# Altium PCB ATRACK_HOST_V1.PcbDoc (part 3 of 3)
Units mm, origin at the board's own origin, x right, y up, seen from the top; angles counter-clockwise.
Board outline 156.4 x 87 mm, 2 copper layers (Top Layer, Bottom Layer); 274 components, 223 nets, 864 pads, 145 vias.
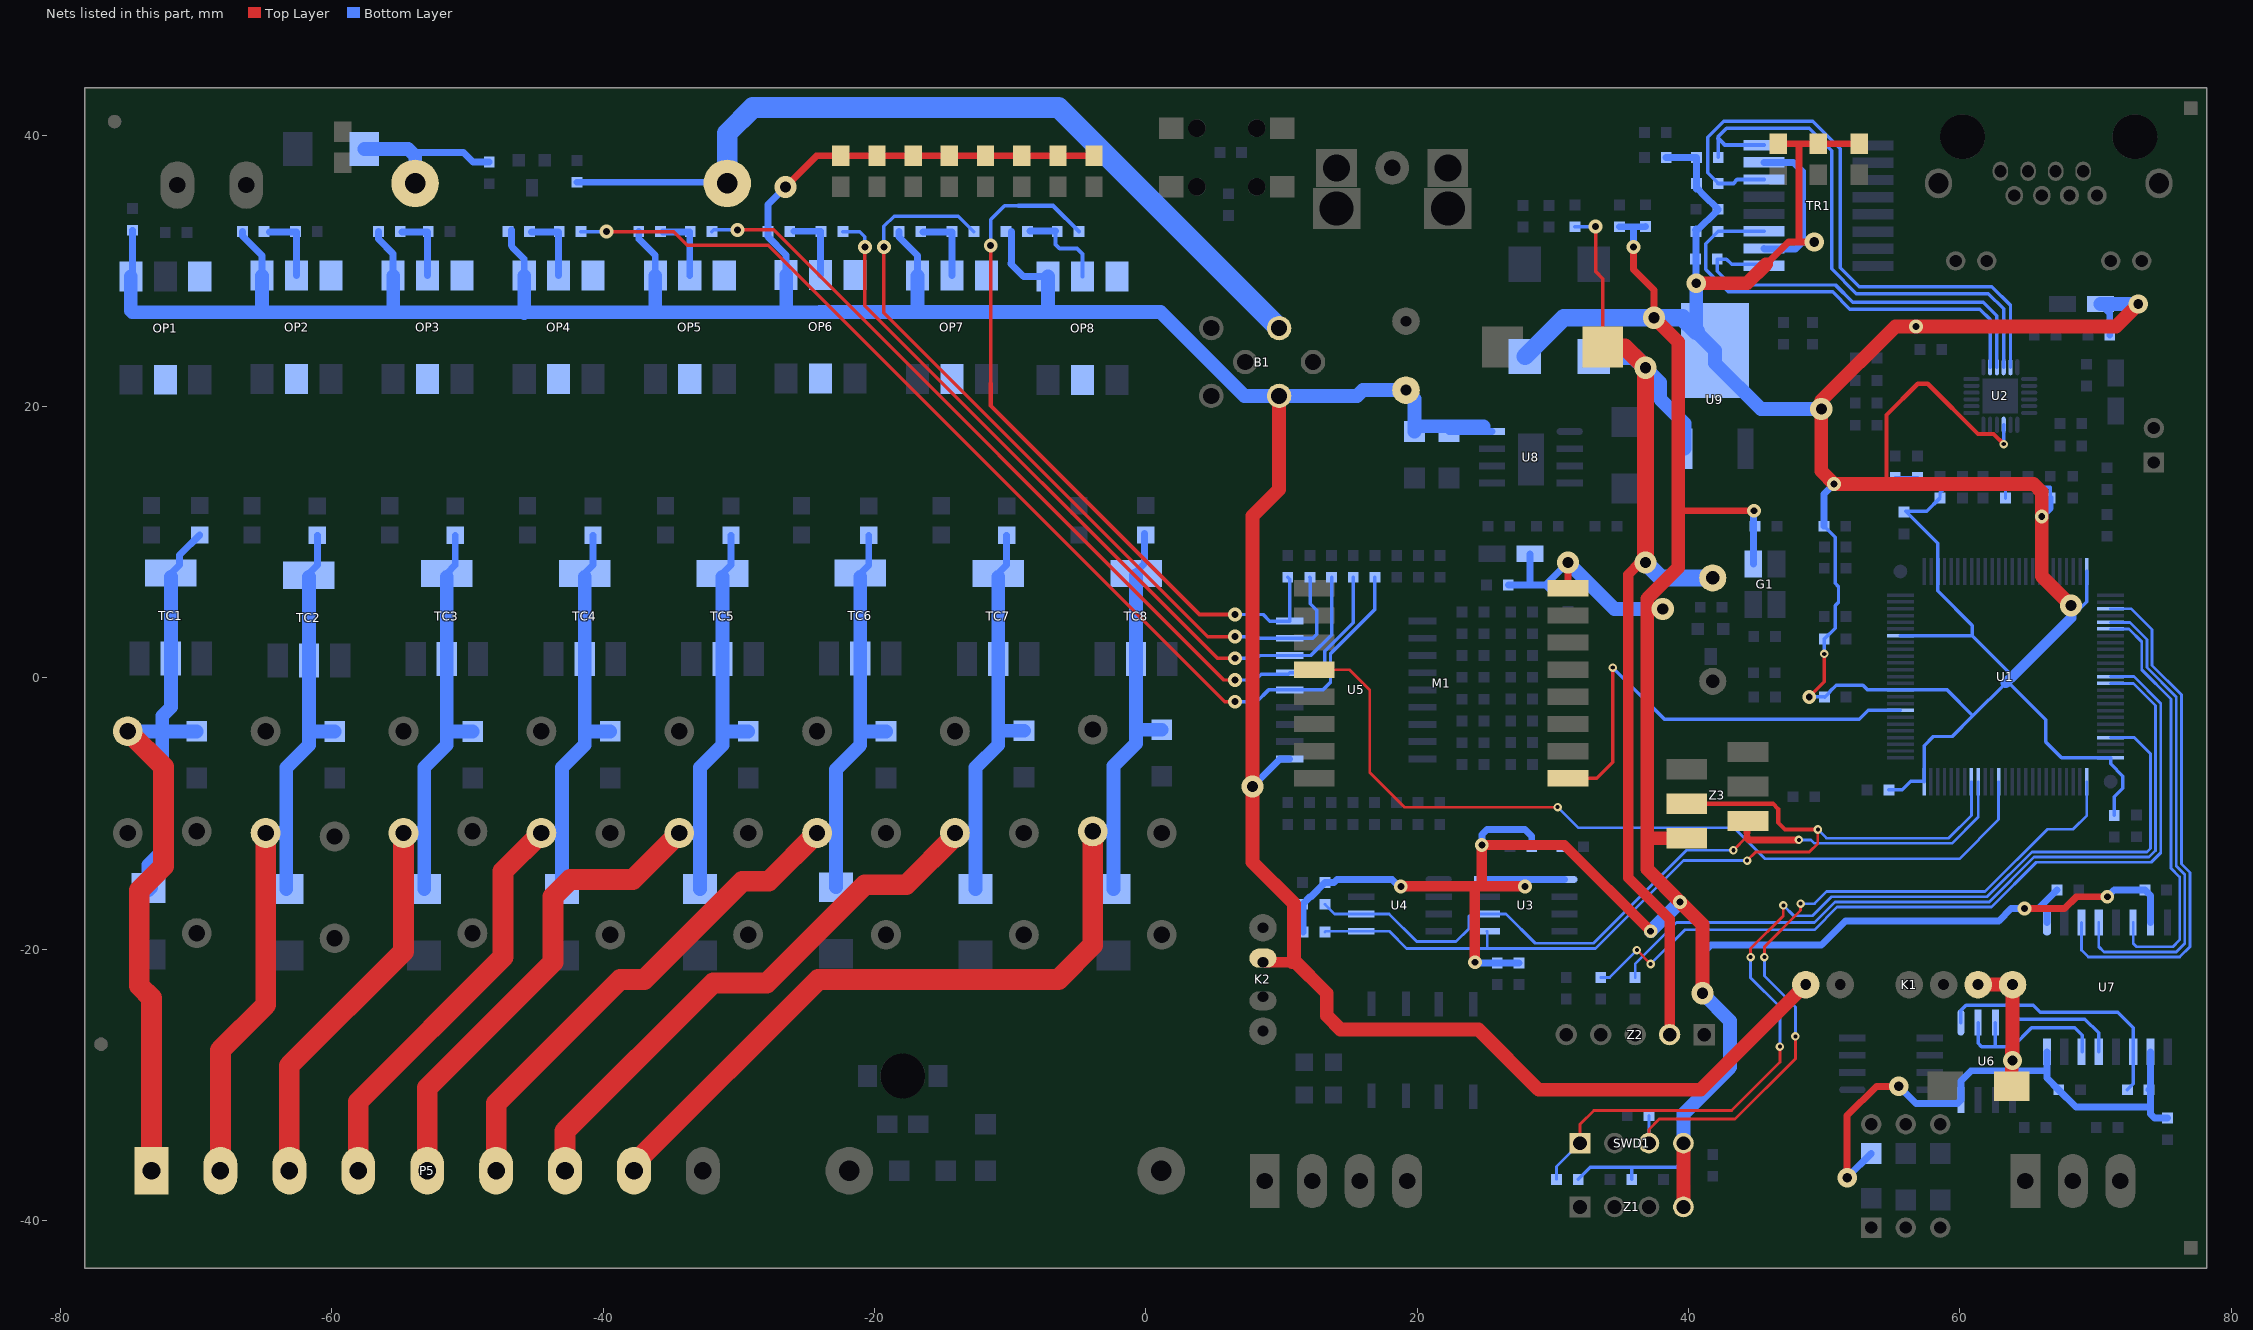
[diagram p3: the nets of this part, all layers, seen from the top]

## Via types
v1: diameter 1.016, hole 0.508, Top Layer to Bottom Layer, tented both sides, 58 vias
v2: diameter 0.635, hole 0.305, Top Layer to Bottom Layer, tented both sides, 39 vias
v3: diameter 0.635, hole 0.3, Top Layer to Bottom Layer, tented both sides, 18 vias
v4: diameter 1.626, hole 0.813, Top Layer to Bottom Layer, tented both sides, 15 vias
v5: diameter 1.422, hole 0.711, Top Layer to Bottom Layer, tented both sides, 7 vias
v6: diameter 1.016, hole 0.5, Top Layer to Bottom Layer, tented both sides, 5 vias
v7: diameter 2.134, hole 1.016, Top Layer to Bottom Layer, tented both sides, 1 vias
v8: diameter 1.524, hole 1, Top Layer to Bottom Layer, tented both sides, 1 vias
v9: diameter 1.422, hole 0.7, Top Layer to Bottom Layer, tented both sides, 1 vias

## Nets (pads, with @x,y where several pads share a name; then routed paths per layer and width w, separated by ;. In a path a pad name is that pad's centre, name@x,y a point inside that pad or via, vN(x,y) a via of type N, cw(c..) or ccw(c..) an arc to the next point about the centre after c; other vN are vias at no path point) (continued)
PZ1_4: R74.2 R93.1 U5.14 | length 79.3
  Top Layer w0.254: v1(-39.751,32.893) -34.798,32.893 -33.782,31.877 -27.813,31.877 5.817,-1.753 v1(6.579,-1.753)
  Bottom Layer w0.254: R93.1@-41.629,32.893 v1(-39.751,32.893) ; v1(6.579,-1.753) 8.179,-1.753 9.042,-0.889 U5.14@10.596,-0.889 13.03,-0.889 13.614,-0.305 13.614,1.781 16.891,5.058 R74.2@16.891,7.417
PZ1_5: R68.2 R96.1 U5.15 | length 66.8
  Top Layer w0.254: v1(-30.099,33.02) -27.432,33.02 5.74,-0.152 v1(6.579,-0.152)
  Bottom Layer w0.254: R96.1@-31.977,32.893 -31.85,33.02 v1(-30.099,33.02) ; v1(6.579,-0.152) 8.077,-0.152 8.509,0.279 10.495,0.279 U5.15@10.596,0.381 12.624,0.381 13.183,0.94 13.183,1.96 15.291,4.068 R68.2@15.291,7.417
PZ1_6: R63.2 R99.1 U5.16 | length 57
  Top Layer w0.254: v1(-20.701,31.75) -20.701,27.432 5.283,1.448 v1(6.579,1.448)
  Bottom Layer w0.254: R99.1@-22.325,32.893 -21.082,32.893 -20.701,32.512 v1(-20.701,31.75) ; v1(6.579,1.448) 8.179,1.448 8.382,1.651 U5.16@10.596,1.651 12.167,1.651 13.691,3.175 R63.2@13.691,7.417
PZ1_7: R58.2 R102.1 U5.17 | length 60.1
  Top Layer w0.254: v1(-19.304,31.75) -19.304,26.924 4.572,3.048 v1(6.578,3.048)
  Bottom Layer w0.254: v1(-19.304,31.75) -19.304,33.274 -18.542,34.036 -13.816,34.036 R102.1@-12.673,32.893 ; v1(6.578,3.048) 8.255,3.048 8.382,2.921 U5.17@10.596,2.921 12.294,2.921 12.598,3.226 12.598,4.978 12.116,5.461 12.116,7.392 R58.2@12.09,7.417
PZ1_8: R52.2 R105.1 U5.18 | length 53.3
  Top Layer w0.254: -11.43,21.717 v1(-11.43,31.877)
  Top Layer w0.305: -11.43,21.717 -11.43,20.066 3.962,4.674 v1(6.578,4.674)
  Bottom Layer w0.254: v1(-11.43,31.877) -11.43,33.782 -10.414,34.798 -9.398,34.798 ; v1(6.578,4.674) 8.661,4.674 9.144,4.191 U5.18@10.596,4.191 10.596,7.286 R52.2@10.465,7.417
  Bottom Layer w0.305: -9.398,34.798 -6.831,34.798 R105.1@-4.926,32.893
PZ2: OP2.2 R56.2 R85.2 | length 5.2
  Bottom Layer w0.508: R56.2@-64.589,32.873 -62.589,32.873 OP2.2@-62.589,29.647
PZ3: OP3.2 R60.2 R89.2 | length 5.1
  Bottom Layer w0.508: R60.2@-54.809,32.873 -52.929,32.873 OP3.2@-52.929,29.647
PZ4: OP4.2 R62.2 R93.2 | length 5.2
  Bottom Layer w0.508: R62.2@-45.269,32.873 -43.269,32.873 OP4.2@-43.269,29.647
PZ5: OP5.2 R65.2 R96.2 | length 5.2
  Bottom Layer w0.508: R65.2@-35.602,32.873 -33.609,32.873 OP5.2@-33.609,29.647
PZ6: OP6.2 R67.2 R99.2 | length 5.2
  Bottom Layer w0.508: R67.2@-25.949,32.923 -23.963,32.923 OP6.2@-23.963,29.697
PZ7: OP7.2 R71.2 R102.2 | length 5.4
  Bottom Layer w0.508: R71.2@-16.416,32.873 -14.289,32.873 OP7.2@-14.289,29.647
PZ8: OP8.2 R73.2 R105.2 | length 6.8
  Bottom Layer w0.305: R105.2@-6.65,32.944 -6.65,31.953 -6.345,31.648 -5.075,31.648 -4.657,31.231 OP8.2@-4.657,29.577
  Bottom Layer w0.508: R73.2@-8.529,32.944 R105.2@-6.65,32.944
QQ1: OP1.3
QQ2: OP1.5
QQ3: OP2.3
QQ4: OP2.5
QQ5: OP3.3
QQ6: OP3.5
QQ7: OP4.3
QQ8: OP4.5
QQ9: OP5.3
QQ10: OP5.5
QQ11: OP6.3
QQ12: OP6.5
QQ13: OP8.3
QQ14: OP8.5
QQ15: OP7.3
QQ16: OP7.5
RD_N: R19.1 TR1.8 U2.22 | length 41.3
  Bottom Layer w0.254: R19.1@42.191,38.354 42.191,39.751 42.191,39.905 42.799,40.513 48.895,40.513 50.546,38.862 50.546,30.143 52.368,28.321 62.103,28.321 63.23,27.194 U2.22@63.23,22.902
  Bottom Layer w0.305: 42.191,39.751 42.674,39.268 TR1.8@45.568,39.268
RD_P: R26.1 TR1.6 U2.23 | length 45.3
  Bottom Layer w0.254: R26.1@42.191,36.449 41.402,37.238 41.402,39.834 42.589,41.021 49.149,41.021 51.181,38.989 51.181,30.226 52.578,28.829 62.357,28.829 63.73,27.456 U2.23@63.73,22.902
  Bottom Layer w0.305: R26.1@42.191,36.449 43.307,36.449 43.586,36.728 TR1.6@45.568,36.728
RESET_R: M1.1 U1.8 | length 33.8
  Top Layer w0.254: M1.1@31.115,-7.397 33.243,-7.397 34.417,-6.223 v2(34.417,0.762)
  Bottom Layer w0.254: v2(34.417,0.762) 38.227,-3.048 52.578,-3.048 53.238,-2.388 U1.8@55.614,-2.388
RX48: U1.56 U7.6 | length 31.1
  Bottom Layer w0.203: U1.56@71.108,3.607 72.466,3.607 73.406,2.667 73.406,0.6 75.565,-1.559 75.565,-14.032 76.2,-14.667 76.2,-19.304 75.692,-19.812 73.025,-19.812 72.771,-19.558 U7.6@72.771,-18.034
RX_K: F2.1 U1.64 | length 57.5
  Bottom Layer w0.203: F2.1@36.068,-22.071 36.068,-21.082 39.116,-18.034 49.276,-18.034 50.8,-16.51 62.165,-16.51 65.467,-13.208 73.945,-13.208 74.422,-12.731 74.422,-2.032 72.796,-0.406 U1.64@71.108,-0.406
RXD1I: R107.2 U6.1 U7.11 | length 19.2
  Bottom Layer w0.254: U6.1@60.071,-25.4 60.071,-24.511 60.452,-24.13 65.405,-24.13 65.913,-24.638 71.628,-24.638 72.771,-25.781 U7.11@72.771,-27.559 72.771,-29.923 R107.2@72.341,-30.353
SCK_R: M1.12 U1.89 | length 63.8
  Top Layer w0.203: M1.12@12.7,0.603 15.018,0.603 16.51,-0.889 16.51,-6.985 19.05,-9.525 v2(30.353,-9.525)
  Top Layer w0.254: M1.12@12.415,0.603 M1.12@12.7,0.603
  Bottom Layer w0.203: v2(30.353,-9.525) 31.877,-11.049 43.372,-11.049 45.658,-13.335 59.957,-13.335 62.853,-10.439 U1.89@62.853,-7.645
SCL: R39.2 U1.92 U3.6 U4.6 Z3.2 | length 59.7
  Top Layer w0.203: v2(43.307,-12.7) 44.323,-11.684 44.323,-11.43
  Top Layer w0.508: 44.323,-11.684 44.323,-11.811 44.45,-11.938 v2(48.133,-11.938) ; 44.323,-11.43 44.323,-10.596 Z3.2@44.378,-10.541
  Bottom Layer w0.203: R39.2@13.208,-16.686 13.921,-17.399 U4.6@15.875,-17.399 17.938,-17.399 19.97,-19.431 22.86,-19.431 23.8,-18.491 23.8,-17.602 24.003,-17.399 U3.6@25.146,-17.399 26.543,-17.399 28.702,-19.558 32.989,-19.558 39.847,-12.7 v2(43.307,-12.7) ; v2(48.133,-11.938) 49.022,-11.938 49.276,-12.192 59.412,-12.192 61.354,-10.249 U1.92@61.354,-7.645
SDA: R38.2 U1.93 U3.5 U4.5 Z3.3 | length 68.2
  Top Layer w0.203: v2(44.323,-13.462) 44.958,-12.827 48.895,-12.827 49.53,-12.192 v2(49.53,-11.176)
  Top Layer w0.305: Z3.3@39.878,-9.271 46.228,-9.271 46.609,-9.652 46.609,-10.668 47.117,-11.176 v2(49.53,-11.176)
  Bottom Layer w0.203: R38.2@13.208,-18.72 13.259,-18.669 U4.5@15.875,-18.669 17.958,-18.669 19.228,-19.939 25.146,-19.939 ; U3.5@25.146,-18.669 25.161,-18.684 25.161,-19.924 25.146,-19.939 ; v2(44.323,-13.462) 39.624,-13.462 33.147,-19.939 25.146,-19.939 ; v2(49.53,-11.176) 50.165,-11.811 59.182,-11.811 60.846,-10.147 U1.93@60.846,-7.645
ST1: D1.A P5.1 R44.1 R80.2 TC1.2 TC1.4 W1.2 | length 66.8
  Top Layer w1.524: W1.2@-75.025,-3.929 -72.401,-6.553 -72.401,-13.874 -74.187,-15.66 -74.187,-22.688 -73.279,-23.596 P5.1@-73.279,-36.322
  Bottom Layer w0.508: TC1.4@-71.836,7.691 -71.215,8.312 -71.215,9.049 R80.2@-69.723,10.541
  Bottom Layer w1.016: W1.2@-75.025,-3.929 -75.011,-3.943 -72.485,-3.943 ; D1.A@-73.323,-15.449 -73.501,-15.627 D1.A@-73.501,-15.494 -73.501,-13.773 -72.485,-12.757 -72.485,-3.943 ; -71.836,-3.943 R44.1@-69.945,-3.943 ; TC1.4@-71.836,7.452 -71.836,-2.165 -72.485,-2.814 -72.485,-3.943
ST2: D2.A P5.2 R50.1 R84.2 TC2.2 TC2.4 W2.2 | length 56.5
  Top Layer w1.524: P5.2@-68.199,-36.322 -68.199,-27.432 -64.865,-24.098 W2.2@-64.865,-11.429
  Bottom Layer w0.508: TC2.4@-61.676,7.691 -61.055,8.312 R84.2@-61.055,10.514
  Bottom Layer w1.016: W2.2@-64.865,-11.429 -64.858,-11.436 -63.341,-11.436 ; D2.A@-63.341,-15.553 -63.341,-11.436 ; TC2.4@-61.676,7.452 TC2.2@-61.676,1.27 -61.676,-3.943 ; R50.1@-59.794,-3.943 -61.676,-3.943 ; -63.341,-11.436 -63.341,-6.61 -61.676,-4.945 -61.676,-3.943
ST3: D5.A P5.3 R57.1 R88.2 TC3.2 TC3.4 W3.2 | length 58.6
  Top Layer w1.524: P5.3@-63.119,-36.322 -63.119,-28.575 -54.705,-20.161 W3.2@-54.705,-11.429
  Bottom Layer w0.508: TC3.4@-51.516,7.691 -50.895,8.312 R88.2@-50.895,10.514
  Bottom Layer w1.016: W3.2@-54.705,-11.429 -54.698,-11.436 -53.181,-11.436 ; D5.A@-53.181,-15.553 -53.181,-11.436 ; TC3.4@-51.516,7.452 TC3.2@-51.516,1.391 -51.516,-3.943 ; R57.1@-49.614,-3.946 -51.513,-3.946 -51.516,-3.943 ; -53.181,-11.436 -53.181,-6.61 -51.516,-4.945 -51.516,-3.943
ST4: D8.A P5.4 R69.1 R92.2 TC4.2 TC4.4 W4.2 | length 60.7
  Top Layer w1.524: P5.4@-58.039,-36.322 -58.039,-31.242 -47.371,-20.574 -47.371,-14.255 W4.2@-44.545,-11.429
  Bottom Layer w0.508: TC4.4@-41.356,7.691 -40.735,8.312 R92.2@-40.735,10.514
  Bottom Layer w1.016: W4.2@-44.545,-11.429 -43.021,-11.429 ; D8.A@-43.021,-15.553 -43.021,-11.429 ; TC4.4@-41.356,7.452 TC4.2@-41.356,1.391 -41.356,-3.943 ; R69.1@-39.465,-3.943 -41.356,-3.943 ; -43.021,-11.429 -43.021,-6.61 -41.356,-4.945 -41.356,-3.943
ST5: D11.A P5.5 R76.1 R95.2 TC5.2 TC5.4 W5.2 | length 65.5
  Top Layer w1.524: P5.5@-52.959,-36.322 -52.959,-30.226 -43.688,-20.955 -43.688,-16.129 -42.418,-14.859 -37.815,-14.859 W5.2@-34.385,-11.429
  Bottom Layer w0.508: TC5.4@-31.196,7.691 -30.575,8.312 R95.2@-30.575,10.514
  Bottom Layer w1.016: W5.2@-34.385,-11.429 -32.861,-11.429 ; D11.A@-32.861,-15.567 -32.861,-11.429 ; TC5.4@-31.196,7.452 TC5.2@-31.196,1.391 -31.196,-3.943 ; R76.1@-29.305,-3.943 -31.196,-3.943 ; -32.861,-11.429 -32.861,-6.61 -31.196,-4.945 -31.196,-3.943
ST6: D14.A P5.6 R79.1 R98.2 TC6.2 TC6.4 W6.2 | length 65.5
  Top Layer w1.524: P5.6@-47.879,-36.322 -47.879,-31.369 -38.735,-22.225 -36.957,-22.225 -29.718,-14.986 -27.782,-14.986 W6.2@-24.225,-11.429
  Bottom Layer w0.508: TC6.4@-21.036,7.691 -20.415,8.312 R98.2@-20.415,10.514
  Bottom Layer w1.016: D14.A@-22.828,-15.426 -22.828,-6.737 -21.036,-4.945 -21.036,-3.943 ; TC6.4@-21.036,7.452 -21.036,-3.943 ; R79.1@-19.145,-3.943 -21.036,-3.943
ST7: D15.A P5.7 R82.1 R101.2 TC7.2 TC7.4 W7.2 | length 71.1
  Top Layer w1.524: P5.7@-42.799,-36.322 -42.799,-33.401 -31.877,-22.479 -27.94,-22.479 -20.701,-15.24 -17.653,-15.24 -14.065,-11.652 W7.2@-14.065,-11.429
  Bottom Layer w0.508: TC7.4@-10.876,7.691 -10.255,8.312 R101.2@-10.255,10.514
  Bottom Layer w1.016: W7.2@-14.065,-11.429 -12.541,-11.429 ; D15.A@-12.541,-15.553 -12.541,-11.429 ; TC7.4@-10.876,7.452 TC7.2@-10.876,1.391 -10.876,-3.901 ; R82.1@-8.98,-3.901 -10.876,-3.901 ; -12.541,-11.429 -12.541,-6.61 -10.876,-4.945 -10.876,-3.901
ST8: D16.A P5.8 R86.1 R104.2 TC8.2 TC8.4 W8.2 | length 79.7
  Top Layer w1.524: P5.8@-37.719,-36.322 -37.719,-35.814 -24.13,-22.225 -6.439,-22.225 -3.905,-19.691 W8.2@-3.905,-11.309
  Bottom Layer w0.508: TC8.4@-0.716,7.811 -0.095,8.432 R104.2@-0.095,10.634
  Bottom Layer w1.016: W8.2@-3.905,-11.309 -2.381,-11.309 ; D16.A@-2.381,-15.553 -2.381,-11.309 ; TC8.4@-0.716,7.572 TC8.2@-0.716,1.391 -0.716,-3.823 ; R86.1@1.175,-3.823 -0.716,-3.823 ; -2.381,-11.309 -2.381,-6.49 -0.716,-4.825 -0.716,-3.823
SWCLK: R8.2 SWD1.3 U1.76 | length 55.8
  Top Layer w0.203: SWD1.3@37.084,-34.29 37.084,-33.274 37.846,-32.512 43.434,-32.512 47.879,-28.067 v2(47.879,-26.416) ; v2(45.593,-20.574) 45.593,-19.812 48.26,-17.145 v2(48.26,-16.637)
  Bottom Layer w0.203: SWD1.3@37.084,-34.29 R8.2@37.084,-32.258 ; v2(45.593,-20.574) 45.593,-21.971 47.879,-24.257 v2(47.879,-26.416) ; v2(48.26,-16.637) 49.276,-16.637 50.165,-15.748 61.849,-15.748 66.445,-11.152 68.35,-11.152 69.355,-10.147 U1.76@69.355,-7.645
SWDIO: R4.2 SWD1.1 U1.72 | length 74.7
  Top Layer w0.203: SWD1.1@32.004,-34.29 32.004,-32.893 33.02,-31.877 43.18,-31.877 46.736,-28.321 v2(46.736,-27.178) ; v2(44.577,-20.574) 44.577,-19.939 46.99,-17.526 v2(46.99,-16.764)
  Bottom Layer w0.203: R4.2@30.277,-36.957 30.277,-36.017 SWD1.1@32.004,-34.29 ; v2(44.577,-20.574) 44.577,-22.098 46.736,-24.257 v2(46.736,-27.178) ; v2(46.99,-16.764) 47.752,-17.526 49.149,-17.526 50.546,-16.129 62.007,-16.129 65.309,-12.827 73.787,-12.827 74.041,-12.573 74.041,-5.588 72.847,-4.394 U1.72@71.108,-4.394
TD_N: R20.1 TR1.3 U2.20 | length 32.6
  Bottom Layer w0.254: TR1.3@45.568,32.918 42.189,32.918 R20.1@42.164,32.893 41.275,32.004 41.275,30.099 42.926,28.448 50.624,28.448 51.894,27.178 61.468,27.178 62.23,26.416 U2.20@62.23,22.902
TD_P: R27.1 TR1.1 U2.21 | length 30.3
  Bottom Layer w0.254: TR1.1@45.568,30.378 45.466,30.48 43.18,30.48 42.799,30.861 R27.1@42.113,30.861 42.113,29.979 43.136,28.956 50.835,28.956 52.105,27.686 61.722,27.686 62.73,26.678 U2.21@62.73,22.902
TX48: U1.55 U7.4 | length 35.3
  Bottom Layer w0.203: U7.4@70.231,-18.034 70.231,-19.812 70.612,-20.193 75.946,-20.193 76.581,-19.558 76.581,-14.509 75.946,-13.874 75.946,-1.401 73.787,0.758 73.787,2.825 72.522,4.089 U1.55@71.108,4.089
TX48_EN: U1.53 U7.3 | length 38.8
  Bottom Layer w0.203: U7.3@68.961,-18.034 68.961,-20.066 69.469,-20.574 76.2,-20.574 76.962,-19.812 76.962,-14.351 76.327,-13.716 76.327,-1.243 74.168,0.916 74.168,3.556 72.619,5.105 U1.53@71.108,5.105
TX_K: F3.1 U1.63 | length 61.4
  Top Layer w0.203: v2(36.195,-20.066) v2(37.211,-21.082)
  Bottom Layer w0.203: F3.1@33.528,-22.071 34.19,-22.071 v2(36.195,-20.066) ; v2(37.211,-21.082) 39.726,-18.567 49.281,-18.567 50.958,-16.891 62.322,-16.891 65.624,-13.589 74.103,-13.589 74.803,-12.889 74.803,-1.874 72.827,0.102 U1.63@71.108,0.102
TXD1I: U6.4 U7.13 | length 8
  Bottom Layer w0.254: U6.4@64.008,-25.146 69.215,-25.146 70.231,-26.162 U7.13@70.231,-27.559
TXD_ENI: U6.2 U6.3 U7.14 | length 13.1
  Bottom Layer w0.254: U6.2@61.341,-25.4 61.341,-26.924 61.595,-27.178 62.611,-27.178 ; U6.3@62.611,-25.4 62.611,-27.178 ; U7.14@69.012,-27.559 69.012,-26.34 68.453,-25.781 65.278,-25.781 63.881,-27.178 62.611,-27.178
VC3: C6.1 C7.1 C8.1 C9.1 C10.1 C11.1 C12.1 C13.2 C14.2 C19.2 C21.2 C22.1 C23.2 C24.2 C33.1 C45.2 G1.4 L1.2 LD1.A LD2.A LD3.A M1.8 R4.1 R7.2 R10.2 R12.2 R13.1 R15.2 R19.2 R20.2 R21.2 R22.1 R23.1 R24.2 R25.1 R26.2 R27.2 R38.1 R39.1 R40.2 R41.1 R117.2 R119.2 SWD1.4 TR1.2 TR1.7 U1.11 U1.19 U1.28 U1.50 U1.75 U1.100 U2.9 U3.1 U3.8 U4.8 U7.1 U7.7 U9.2 Z1.4 Z3.1 | length 504.6
  Top Layer w0.254: v1(48.895,-1.397) 50.004,-0.288 v3(50.004,1.776)
  Top Layer w0.305: 54.598,14.3 54.598,19.38 56.897,21.679 57.633,21.679 61.329,17.983 62.472,17.983 v3(63.23,17.225)
  Top Layer w0.508: M1.8@31.115,6.603 v4(31.115,8.509) ; v1(35.941,31.75) 35.941,30.099 37.465,28.575 v4(37.465,26.543) ; 39.243,12.319 v1(44.831,12.319) ; 45.72,30.48 47.371,32.131 48.133,32.131 ; LD3.A@46.609,39.37 48.133,39.37 ; v5(49.276,32.131) 48.133,32.131 ; LD1.A@52.578,39.37 48.133,39.37 ; v1(64.77,-16.991) 67.718,-16.991 68.58,-16.129 v1(70.866,-16.129) ; 48.133,32.131 48.133,39.37
  Top Layer w0.762: v1(18.796,-15.367) 24.257,-15.367 ; v1(24.257,-20.955) 24.257,-15.367 ; v1(27.94,-15.367) 24.765,-15.367 ; v1(37.211,-18.669) 30.861,-12.319 v1(24.765,-12.319) 24.765,-15.367 ; 24.257,-15.367 24.765,-15.367
  Top Layer w1.016: v4(37.465,26.543) 39.243,24.765 39.243,12.319 39.243,8.128 36.957,5.842 36.957,5.08 ; v4(38.1,5.08) 36.957,5.08 ; Z1.4@39.624,-38.989 SWD1.4@39.624,-34.29 ; Z3.1@39.878,-11.811 37.084,-11.811 36.957,-11.684 ; v5(40.564,29.083) 44.323,29.083 45.72,30.48 ; v4(41.021,-23.241) 41.021,-18.161 v1(39.37,-16.51) 36.957,-14.097 36.957,-11.684 ; v4(68.199,5.334) 66.028,7.505 v6(66.028,11.887) 66.028,13.716 65.444,14.3 54.598,14.3 v1(50.724,14.3) 49.784,15.24 v4(49.784,19.812) 49.784,20.447 55.245,25.908 v1(56.769,25.908) 71.501,25.908 v5(73.152,27.559) ; 36.957,-11.684 36.957,5.08
  Bottom Layer w0.254: R4.1@31.877,-36.957 32.766,-36.068 35.814,-36.068 ; R10.2@35.814,-36.957 35.814,-36.068 ; SWD1.4@39.624,-34.29 39.624,-35.56 39.116,-36.068 35.814,-36.068 ; v1(48.895,-1.397) C6.1@50.011,-1.397 50.038,-1.424 50.405,-1.057 50.405,-1.002 50.875,-0.533 52.857,-0.533 53.213,-0.889 U1.11@55.614,-0.889 59.055,-0.889 60.96,-2.794 ; R12.2@49.989,11.176 50.8,10.365 50.8,6.985 51.054,6.731 51.054,5.588 50.8,5.334 50.8,3.666 R7.2@50.004,2.87 v3(50.004,1.776) ; C10.1@54.764,-8.255 55.753,-8.255 56.388,-7.62 57.341,-7.62 U1.100@57.367,-7.645 57.367,-4.99 58.039,-4.318 59.436,-4.318 60.96,-2.794 ; R24.2@55.233,14.759 R21.2@56.884,14.759 57.597,14.046 58.916,14.046 ; U1.19@55.614,3.099 60.909,3.099 ; C12.1@55.995,12.295 57.57,12.295 58.535,13.261 58.535,13.665 58.916,14.046 ; C12.1@56.122,12.168 58.357,9.933 U1.28@58.357,7.849 58.357,6.413 60.909,3.861 60.909,3.099 ; v3(63.23,17.225) U2.9@63.23,18.652 ; R22.1@63.361,13.257 63.361,14.046 ; 63.373,-0.381 60.96,-2.794 ; 63.5,-0.254 66.319,-3.073 66.319,-4.724 67.488,-5.893 U1.75@71.108,-5.893 71.108,-6.338 72.009,-7.239 72.009,-8.128 71.374,-8.763 C11.1@71.374,-10.133 ; 63.881,0.127 60.909,3.099 ; R25.1@66.663,13.257 66.663,14.046 63.361,14.046 ; C9.1@67.156,-15.621 C9.1@67.183,-15.648 ; 68.199,4.445 69.355,5.601 U1.50@69.355,7.849 ; 58.916,14.046 63.361,14.046
  Bottom Layer w0.508: R38.1@11.608,-18.72 11.608,-16.737 C22.1@11.557,-16.686 12.114,-16.129 12.165,-16.129 R39.1@13.208,-15.086 13.87,-15.086 14.097,-14.859 U4.8@15.875,-14.859 18.161,-14.859 18.796,-15.494 v1(18.796,-15.367) ; v1(24.257,-20.955) 24.308,-21.006 R119.2@25.908,-21.006 R117.2@27.508,-21.006 ; v1(24.765,-12.319) 24.765,-11.557 25.146,-11.176 27.94,-11.176 28.448,-11.684 C7.1@28.448,-12.446 R40.2@30.658,-12.446 ; U3.8@25.146,-14.859 27.94,-14.859 ; C24.2@26.719,6.858 28.321,6.858 ; v1(27.94,-15.367) 27.94,-14.859 ; C23.2@28.327,9.144 28.321,9.138 28.321,6.858 ; U3.1@30.861,-14.859 27.94,-14.859 ; R41.1@31.115,6.504 31.088,6.477 29.845,6.477 29.464,6.858 ; v4(31.115,8.509) 29.464,6.858 ; R13.1@34.925,33.247 35.941,33.247 ; v1(35.941,31.75) 35.941,33.247 ; R15.2@36.83,33.274 36.803,33.247 35.941,33.247 ; C13.2@38.354,38.354 R19.2@40.591,38.354 R26.2@40.591,36.449 R26.2@40.591,36.117 ; R20.2@40.513,33.02 40.564,33.071 R20.2@40.564,32.893 ; v5(40.564,29.083) R20.2@40.564,32.893 ; 40.591,36.017 40.691,36.017 41.11,35.598 C14.2@42.164,34.544 42.164,34.493 R20.2@40.564,32.893 ; v4(41.021,-23.241) 41.021,-20.32 41.656,-19.685 49.784,-19.685 51.562,-17.907 62.865,-17.907 63.781,-16.991 v1(64.77,-16.991) 65.786,-16.991 66.04,-16.737 ; G1.4@44.78,8.382 44.78,12.268 v1(44.831,12.319) ; TR1.2@45.568,31.648 45.593,31.623 47.879,31.623 48.387,32.131 ; TR1.7@45.568,37.998 47.727,37.998 48.387,37.338 48.387,32.131 ; v5(49.276,32.131) 48.387,32.131 ; R12.2@49.989,11.176 49.989,13.54 50.8,14.351 50.775,14.351 v1(50.724,14.3) ; v1(56.769,25.908) 56.794,25.933 L1.2@58.74,25.933 ; v6(66.028,11.887) 66.663,12.522 R25.1@66.663,13.257 ; U7.1@66.421,-18.034 66.421,-17.118 66.04,-16.737 ; C9.1@67.156,-15.621 66.04,-16.737 ; C21.2@70.364,27.559 71.042,26.881 C19.2@71.042,25.273 ; v1(70.866,-16.129) 71.374,-15.621 C33.1@73.633,-15.621 74.041,-16.029 U7.7@74.041,-18.034 ; 28.321,6.858 29.464,6.858
  Bottom Layer w0.762: 63.373,-0.381 63.5,-0.254 63.881,0.127 68.199,4.445 v4(68.199,5.334)
  Bottom Layer w1.016: v4(31.115,8.509) 34.544,5.08 v4(38.1,5.08) ; v1(37.211,-18.669) v1(39.37,-16.51) ; SWD1.4@39.624,-34.29 39.624,-32.131 43.053,-28.702 43.053,-25.273 v4(41.021,-23.241) ; v5(40.564,29.083) 40.564,25.527 U9.2@41.961,24.13 41.961,23.19 45.339,19.812 v4(49.784,19.812) ; C21.2@70.364,27.559 v5(73.152,27.559)
  Bottom Layer w1.27: C45.2@27.94,23.68 30.803,26.543 v4(37.465,26.543) 39.548,26.543 U9.2@40.564,25.527
VC5: BUZZER1.1 C44.2 L2.2 R111.1 U9.3 Z2.2 | length 81.9
  Top Layer w0.254: v1(33.147,33.274) 33.147,29.972 33.689,29.43 L2.2@33.689,24.384
  Top Layer w0.762: v4@36.449,8.509 35.56,7.62 35.56,-14.732 38.608,-17.78 Z2.2@38.608,-26.289
  Top Layer w1.27: L2.2@33.689,24.384 35.306,24.384 v4(36.83,22.86) v4(36.83,8.509)
  Bottom Layer w0.254: R111.1@31.623,33.247 v1@33.147,33.247
  Bottom Layer w1.016: v4(36.83,22.86) 37.91,21.78 37.91,20.549 39.7,18.758 U9.3@39.7,16.891
  Bottom Layer w1.27: C44.2@33.02,23.68 36.01,23.68 v4(36.83,22.86) ; v4(36.83,8.509) 37.973,7.366 BUZZER1.1@41.783,7.366
VCC_I: C34.2 C36.1 C37.1 K1.6 K1.7 R107.1 R110.2 U6.8 U7.10 U7.16 | length 53.2
  Top Layer w0.508: v5(51.689,-36.83) 51.689,-32.258 53.848,-30.099 v5(55.499,-30.099)
  Top Layer w1.016: K1.6@61.341,-22.606 K1.7@63.881,-22.606 63.881,-27.379 ; C34.2@63.828,-30.099 63.828,-27.432 63.881,-27.379 ; v5(63.881,-28.194) 63.881,-27.379
  Bottom Layer w0.508: v5(51.689,-36.83) R110.2@53.467,-35.052 ; v5(55.499,-30.099) 56.769,-31.369 59.817,-31.369 U6.8@60.071,-31.115 60.071,-29.718 60.833,-28.956 63.881,-28.956 ; v5(63.881,-28.194) 63.881,-28.956 ; U7.16@66.421,-27.559 66.421,-28.956 ; R107.1@73.941,-30.353 R107.1@74.041,-30.253 ; U7.10@74.041,-27.559 R107.1@74.041,-30.253 ; C37.1@75.311,-32.436 74.346,-32.436 74.041,-32.131 74.041,-31.623 ; 63.881,-28.956 66.421,-28.956 ; 66.421,-28.956 66.421,-29.491 C36.1@67.283,-30.353 68.553,-31.623 74.041,-31.623 ; 74.041,-31.623 R107.1@74.041,-30.253
VX: B1.CB C38.2 C42.2 C43.2 D3.A D4.A D6.A D7.A D9.A D10.A D12.A D13.A K1.1 K2.2 OP1.1 OP2.1 OP3.1 OP4.1 OP5.1 OP6.1 OP7.1 OP8.1 R54.1 R56.1 R60.1 R62.1 R65.1 R67.1 R71.1 R73.1 U5.10 U8.8 | length 283.6
  Top Layer w0.508: v4(-26.543,36.195) -24.257,38.481 D3.A@-22.479,38.481 D4.A@-19.812,38.481 D6.A@-17.145,38.481 D7.A@-14.478,38.481 D9.A@-11.811,38.481 D10.A@-9.144,38.481 D12.A@-6.477,38.481 D13.A@-3.81,38.481
  Top Layer w0.762: K2.2@8.636,-20.955 10.795,-20.955
  Top Layer w1.016: B1.CB@9.826,20.781 9.826,13.89 7.874,11.938 v4(7.874,-8.001) 7.874,-13.589 10.922,-16.637 10.922,-20.828 ; 10.795,-20.955 10.922,-20.828 ; K1.1@48.641,-22.606 40.894,-30.353 28.956,-30.353 24.511,-25.908 14.351,-25.908 13.335,-24.892 13.335,-23.241 10.922,-20.828
  Bottom Layer w0.508: OP1.1@-74.803,29.591 -74.676,29.718 R54.1@-74.676,32.993 ; R56.1@-66.575,32.893 -66.575,32.573 -65.129,31.127 OP2.1@-65.129,29.647 ; R60.1@-56.542,32.893 -56.542,32.334 -55.469,31.261 OP3.1@-55.469,29.647 ; -46.736,31.877 R62.1@-46.736,33.02 ; -46.673,31.737 -45.809,30.873 OP4.1@-45.809,29.647 ; R65.1@-37.365,32.893 -37.365,32.343 -36.149,31.127 OP5.1@-36.149,29.647 ; v4(-26.543,36.195) -27.84,34.898 R67.1@-27.84,32.893 -27.84,32.514 -26.503,31.177 OP6.1@-26.503,29.697 ; R71.1@-18.188,32.893 -18.188,32.486 -16.829,31.127 OP7.1@-16.829,29.647 ; -9.952,30.531 -9.901,30.48 ; -9.901,32.893 -9.901,30.48 ; OP8.1@-7.197,29.577 -8.998,29.577 -9.901,30.48 ; v4(7.874,-8.001) 9.906,-5.969 U5.10@10.596,-5.969 ; C43.2@22.347,18.164 22.35,18.161 U8.8@25.527,18.161
  Bottom Layer w1.016: -74.803,27.06 OP1.1@-74.803,29.591 ; -74.696,26.954 -45.809,26.954 ; -65.129,27.017 OP2.1@-65.129,29.647 ; -55.469,27.045 OP3.1@-55.469,29.647 ; -45.809,26.904 -45.809,26.954 ; OP4.1@-45.809,29.647 -45.809,26.954 ; -36.149,27.093 OP5.1@-36.149,29.647 ; -26.503,26.975 OP6.1@-26.503,29.697 ; -24.003,26.954 -45.809,26.954 ; -24.003,26.975 -7.197,26.975 ; -16.829,27.051 OP7.1@-16.829,29.647 ; OP8.1@-7.197,29.577 -7.197,26.975 ; C42.2@19.81,18.161 C42.2@19.807,18.164 19.807,20.579 C38.2@19.177,21.209 16.002,21.209 15.574,20.781 B1.CB@9.826,20.781 7.286,20.781 1.092,26.975 -7.197,26.975 ; C42.2@19.812,18.542 24.892,18.542
VX_IN: D19.K F18.1 R115.2 | length 12
  Bottom Layer w0.508: -54.102,38.735 -50.292,38.735 -49.579,38.022 R115.2@-48.387,38.022
  Bottom Layer w1.016: D19.K@-57.603,38.989 -54.356,38.989 -54.102,38.735 -53.848,38.481 F18.1@-53.848,36.449
VX_IN2: B1.B F18.2 R116.2 | length 63
  Bottom Layer w0.508: R116.2@-41.91,36.527 -30.926,36.527 F18.2@-30.848,36.449
  Bottom Layer w1.524: F18.2@-30.848,36.449 -30.848,40.145 -28.956,42.037 -6.43,42.037 B1.B@9.826,25.781
pads on no net: G1.1 KEY1.0 M1.3 M1.4 M1.5 M1.6 M1.7 M1.16 MM1.0 MM2.0 MM3. MM4. MM6.0 MM7.0 MM8. MM9. RESET1.0 TR1.4 TR1.5 U1.6 U1.13 U1.15 U1.18 U1.26 U1.35 U1.36 U1.37 U1.38 U1.39 U1.40 U1.41 U1.42 U1.43 U1.44 U1.45 U1.46 U1.47 U1.54 U1.57 U1.58 U1.59 U1.60 U1.61 U1.65 U1.66 U1.68 U1.69 U1.70 U1.71 U1.77 U1.80 U1.81 U1.82 U1.83 U1.84 U1.85 U1.101 U1.102 U2.4 U3.7 U4.7 U7.5 U8.2 U8.6 ZE1.0

## Polygon pours and split planes (outlines as drawn)
no net on Top Layer "TopLayer-GND" (hatched 90Degree grid 0.508 track 0.203, pour order 9): 2071.951,997.458
GND on Top Layer "G1" (solid, remove dead copper, pour order 2): -1.27,43.561 -1.143,43.434 -1.143,-0.635 7.874,-9.652 7.874,-13.589 10.999,-16.714 10.999,-22.429 14.351,-25.781 24.257,-25.781 24.257,-43.561 49.784,-43.561 49.784,-19.685 78.232,-19.685 78.232,43.561
no net on Mech_Góra "F2" (solid): 79.7,-45.3 76,-45.3 76,-43.5 78.2,-43.5 78.2,-31.3 76.2,-31.3 76.2,-29.5 78.2,-29.5 78.2,29.5 76.2,29.5 76.2,31.3 78.2,31.3 78.2,43.5 76,43.5 76,45.3 79.7,45.3 79.7,-45.3
no net on Mech_Góra "F2" (solid): -79.7,45.3 -76,45.3 -76,43.5 -78.2,43.5 -78.2,31.3 -76.2,31.3 -76.2,29.5 -78.2,29.5 -78.2,-29.5 -76.2,-29.5 -76.2,-31.3 -78.2,-31.3 -78.2,-43.5 -76,-43.5 -76,-45.3 -79.7,-45.3 -79.7,45.3
no net on Mech_Góra "F1" (solid): 23,-29.5 30,-29.5 30,-31.3 27.8,-31.3 27.8,-43.5 30,-43.5 30,-45.3 23,-45.3 23,-43.5 25.2,-43.5 25.2,-31.3 23,-31.3
no net on Mech_Góra "F1" (solid): -30,-29.5 -23,-29.5 -23,-31.3 -25.2,-31.3 -25.2,-43.5 -23,-43.5 -23,-45.3 -30,-45.3 -30,-43.5 -27.8,-43.5 -27.8,-31.3 -30,-31.3
no net on Mech_Góra "F1" (solid): 23,45.3 30,45.3 30,43.5 27.8,43.5 27.8,31.3 30,31.3 30,29.5 23,29.5 23,31.3 25.2,31.3 25.2,43.5 23,43.5
no net on Mech_Góra "F1" (solid): -30,45.3 -23,45.3 -23,43.5 -25.2,43.5 -25.2,31.3 -23,31.3 -23,29.5 -30,29.5 -30,31.3 -27.8,31.3 -27.8,43.5 -30,43.5
no net on Mech_Spod "F2" (hatched 45Degree grid 1 track 0.1): 76.2,22 0.5,22 0.5,41.5 21.5,41.5 21.5,38.8 22.5,38.8 22.5,41.5 43.5,41.5 43.5,38.8 44.5,38.8 44.5,41.5 65.3,41.5 65.3,38.8 66.3,38.8 66.3,41.5 76.2,41.5
no net on Mech_Spod "F2" (hatched 45Degree grid 1 track 0.1): -76.2,22 -0.5,22 -0.5,41.5 -21.5,41.5 -21.5,38.8 -22.5,38.8 -22.5,41.5 -43.5,41.5 -43.5,38.8 -44.5,38.8 -44.5,41.5 -65.3,41.5 -65.3,38.8 -66.3,38.8 -66.3,41.5 -76.2,41.5
VC3 on Bottom Layer "VC3_PROC" (solid, pour order 11): 56.896,6.604 69.85,6.604 69.85,-6.35 56.896,-6.35

## Silkscreen, mask and mechanical layers (free items; w line width, h text height)
Top Overlay:
  lines w0.254: 67.183,-41.275 69.596,-41.275 ; 67.437,-41.783 69.342,-41.783 ; 67.691,-42.291 69.088,-42.291 ; 68.072,-42.799 68.834,-42.799 ; 68.453,-41.275 68.453,-40.767
  text "RST" at 0.127,37.846 h1.52 r90
  text "7" at -20.066,32.766 h1.52
  text "6" at -17.653,32.766 h1.52
  text "5" at -14.859,32.766 h1.52
  text "4" at -12.319,32.766 h1.52
  text "3" at -9.652,32.766 h1.52
  text "2" at -6.731,32.766 h1.52
  text "KEY1" at 3.556,31.877 h1.52
  text "PK1" at -2.921,30.734 h1.52 r90
  text "ZAS" at 47.371,30.734 h1.52 r90
  text "PK8" at -21.59,30.226 h1.52 r90
  text "LED1" at 53.34,29.591 h1.52 r90
  text "LED2" at 50.419,29.464 h1.52 r90
  text "+12" at -67.056,29.083 h1.52
  text "GND" at -74.295,28.956 h1.52
  text "FUSE" at -58.293,28.956 h1.52 r90
  text "PK1 Amort. lewy" at -72.926,23.622 h1.14
  text "e-LINE-HOST" at -38.989,22.098 h2.54
  text "PK2 Amort. prawy" at -72.926,21.717 h1.14
  text "PK3 Rolka-L przod/Falownik" at -72.926,19.812 h1.14
  text "ELHOS s.c." at -34.036,18.415 h2.03
  text "PK4 rolka-L tył" at -73.025,17.78 h1.14
  text "PK5 rolka-P przod" at -73.025,15.748 h1.14
  text "GEKA" at -29.718,15.24 h2.03
  text "GND" at 72.263,14.986 h1.52 r90
  text "PK6 rolka-P tył" at -73.025,13.843 h1.14
  text "PK7 rolka-L predk." at -72.898,11.684 h1.14
  text "2021.01.29" at -33.909,11.684 h2.03
  text "PK8 rolka-P predk." at -73.025,9.652 h1.14
  text "1" at 32.766,-9.906 h1.52 r90
  text "1" at 41.148,-15.367 h2.03 r90
  text "1" at 43.688,-27.432 h1.52
  text "1" at -73.66,-29.591 h2.54
  text "2" at -69.088,-29.845 h2.54
  text "3" at -64.008,-29.845 h2.54
  text "4" at -58.674,-29.972 h2.54
  text "5" at -53.721,-29.972 h2.54
  text "6" at -48.768,-29.972 h2.54
  text "7" at -43.053,-29.972 h2.54
  text "8" at -38.1,-29.972 h2.54
  text "COM" at -33.274,-29.972 h2.54
  text "FUSE" at -14.732,-30.099 h1.52
  text "1" at 29.464,-34.925 h1.52
  text "SWD" at 42.164,-34.925 h1.52
  text "1" at 29.464,-39.751 h1.52
  text "DBG" at 42.037,-39.751 h1.52
  text "INP1" at 8.128,-42.291 h1.52
  text "INP2" at 15.113,-42.291 h1.52
  text "L+" at 63.627,-42.418 h1.52
  text "L-" at 71.501,-42.545 h1.52
  text "1" at 53.848,-42.799 h1.52 r90
  text "3" at 59.563,-42.926 h1.52 r90
  text "2" at 56.769,-43.053 h1.52 r90
Mech_Obrys:
  the board outline again, w0.2
Mechanical 2:
  lines w0.2: -80.3,0 -78.2,0 ; -76.2,-31.3 76.2,-31.3 ; -76.2,-29.5 76.2,-29.5 ; -76.2,29.5 76.2,29.5 ; -76.2,31.3 76.2,31.3 ; -1.2,6.731 1.2,6.731 ; 0,5.731 0,7.831 ; -76.2,-41.5 -76.2,41.5 76.2,41.5 76.2,-41.5 -76.2,-41.5
Mech_Spod:
  lines w0.2: -76.2,22 -38.1,22 -0.5,22 -0.5,41.5 -21.5,41.5 -21.5,38.8 -22.5,38.8 -22.5,41.5 -43.5,41.5 -43.5,38.8 -44.5,38.8 -44.5,41.5 -65.3,41.5 -65.3,38.8 -66.3,38.8 -66.3,41.5 -76.2,41.5 -76.2,22 ; -76.2,22 -76.2,-41.5 76.2,-41.5 76.2,22 ; 76.2,22 38.1,22 0.5,22 0.5,41.5 21.5,41.5 21.5,38.8 22.5,38.8 22.5,41.5 43.5,41.5 43.5,38.8 44.5,38.8 44.5,41.5 65.3,41.5 65.3,38.8 66.3,38.8 66.3,41.5 76.2,41.5 76.2,22
  text "H=3mm" at -73.2,25.531 h2.03
  text "H=8mm" at -73.3,23.4 h2.03
Mech_Góra:
  lines w0.2: -27.8,-31.3 -27.8,-43.5 -30,-43.5 -30,-45.3 -26.5,-45.3 -23,-45.3 -23,-43.5 -25.2,-43.5 -25.2,-31.3 ; -27.8,-24.569 -30,-24.569 -30,-22.769 -26.5,-22.769 -23,-22.769 -23,-24.569 -25.2,-24.569 ; -79.7,-45.3 -76,-45.3 -76,-43.5 -78.2,-43.5 -78.2,-31.3 -76.2,-31.3 -76.2,-29.5 -78.2,-29.5 -78.2,29.5 -76.2,29.5 -76.2,31.3 -78.2,31.3 -78.2,43.5 -76,43.5 -76,45.3 -79.7,45.3 -79.7,-45.3 ; -30,29.5 -30,31.3 -27.8,31.3 -27.8,43.5 -30,43.5 -30,45.3 -26.5,45.3 -23,45.3 -23,43.5 -25.2,43.5 -25.2,31.3 -23,31.3 -23,29.5 -26.5,29.5 -30,29.5 ; 23,-45.3 23,-43.5 25.2,-43.5 25.2,-31.3 23,-31.3 23,-29.5 26.5,-29.5 30,-29.5 30,-31.3 27.8,-31.3 27.8,-43.5 30,-43.5 30,-45.3 26.5,-45.3 23,-45.3 ; 23,29.5 23,31.3 25.2,31.3 25.2,43.5 23,43.5 23,45.3 26.5,45.3 30,45.3 30,43.5 27.8,43.5 27.8,31.3 30,31.3 30,29.5 26.5,29.5 23,29.5 ; 76,-45.3 76,-43.5 78.2,-43.5 78.2,-31.3 76.2,-31.3 76.2,-29.5 78.2,-29.5 78.2,29.5 76.2,29.5 76.2,31.3 78.2,31.3 78.2,43.5 76,43.5 76,45.3 79.7,45.3 79.7,-45.3 76,-45.3

## Text inside footprints (layer, text, board x,y; h text height)
K2: Top Overlay "-" at 11.176,-24.003 h1.14 r90; Top Overlay "+" at 10.922,-27.686 h1.14 r90; Top Overlay "+" at 11.303,-21.59 h1.14 r90; Top Overlay "-" at 11.176,-18.669 h1.14 r90; Top Overlay "INP" at 12.446,-20.193 h1.14 r90; Top Overlay "OUT" at 12.446,-26.543 h1.14 r90
M1: Top Overlay "1" at 28.821,-7.586 h1.14 r90
TR1: Bottom Overlay "1" at 46.177,28.88 h1.4 r270
ZE1: Top Overlay "1" at 63.246,40.259 h1.14 r180